# Altium PCB main.PcbDoc
Units mil, origin at the board's own origin, x right, y up, seen from the top; angles counter-clockwise.
Board outline 3149.61 x 1417.32 mil, 2 copper layers (Top Layer, Bottom Layer); 65 components, 52 nets, 246 pads, 43 vias.
Unrouted connection lines stored in the file: 108.
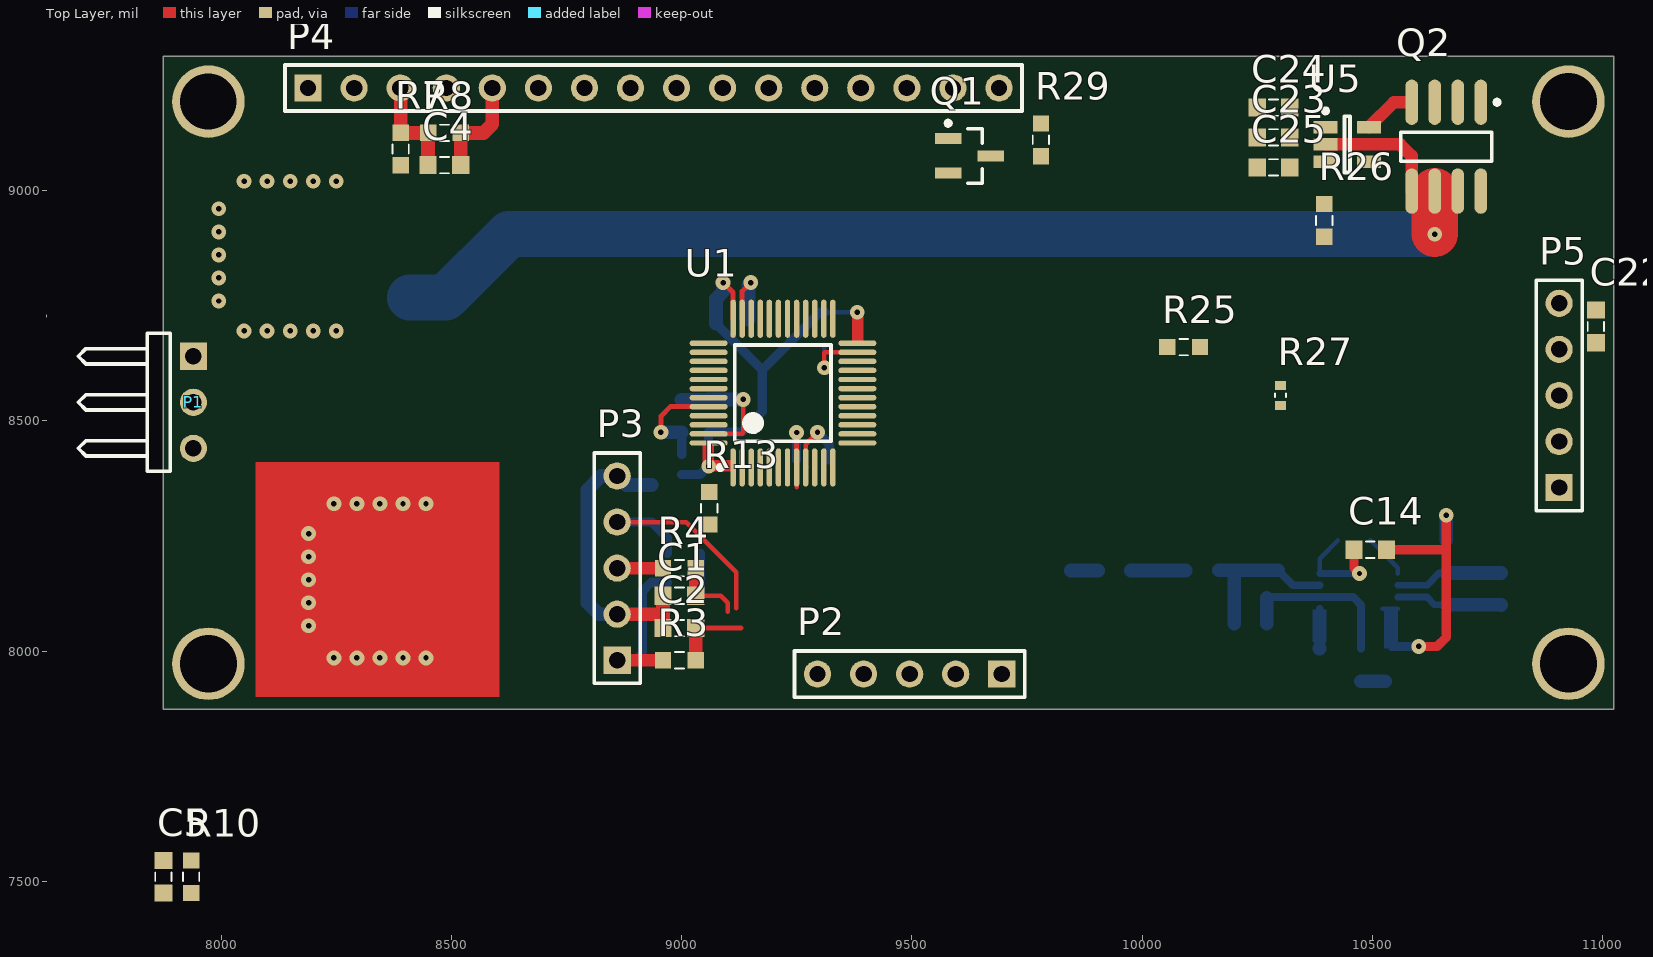
[diagram p0: Top Layer view]
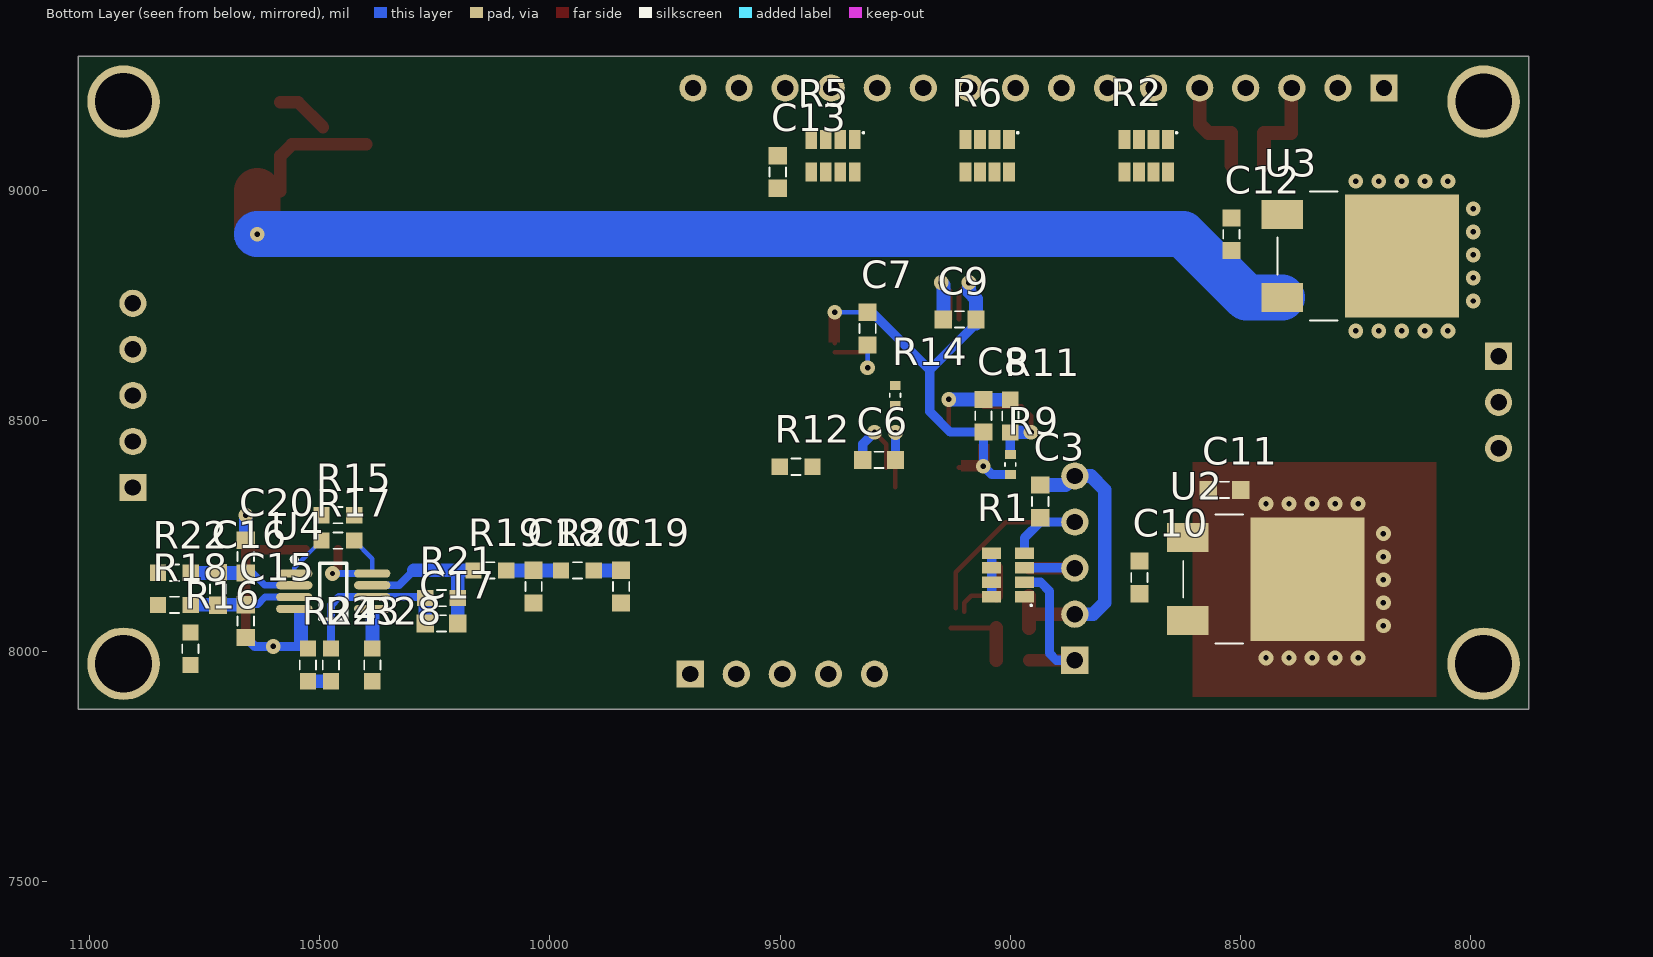
[diagram p1: Bottom Layer view, seen from below]

## Layer stack, top to bottom
Top Solder: solder mask 0.4, Solder Resist, Dk 3.5
Top Layer: signal copper 1.4
Dielectric 1: dielectric 12.6, FR-4, Dk 4.8
Bottom Layer: signal copper 1.4
Bottom Solder: solder mask 0.4, Solder Resist, Dk 3.5

## Board outline
7874.02,7874.02 7874.02,9291.34 11023.62,9291.34 11023.62,7874.02

## Design rules (kind name [scope] priority, off if disabled: settings)
Clearance [All] p1: gap=10 except(5: SMDPad-SMDPad; 8: Track-Track Track-SMDPad)
PolygonConnect [All] p1: connectstyle=Relief reliefconductorwidth=10 reliefentries=4 polygonreliefangle="90 Angle" airgapwidth=10
RoutingVias [All] p1: holewidth=11.81 width=32 viastyle="Through Hole" minholewidth=11.81 minwidth=32 maxholewidth=11.81 maxwidth=100
SolderMaskExpansion [All] p1: expansion=4
Width [All] p1: maxlimit=100 minlimit=6 preferedwidth=10 minimp=50.000000 maximp=50.000000 favimp=50.000000
30 further rules are at their usual default settings.

## Classes and differential pairs
component class "Weller FrontEnd": C14 C15 C16 C17 C18 C19 C20 C22 C23 C24 C25 P5 Q2 R15 R16 R17 R18 R19 R20 R21 R22 R23 R24 R25 R26 R28 U4 U5
component class Power: C10 C11 C12 C13 R14 R27 U2 U3
component class MCU: C5 C6 C7 C8 C9 R9 R10 R11 R12 R13 U1
component class HD44780: C4 P4 Q1 R2 R5 R6 R7 R8 R29
component class Encoder: C1 C2 C3 P3 R1 R3 R4
component class Debugging: P1 P2

## Components (designator, comment, footprint, x,y, rotation, side; value= is the part's Value field where it differs from the comment)
C1 "C" C0603 8995,8120 r180 top
C2 "C" C0603 8995,8050 r180 top
C3 "C" C0603 8935,8325 r90 bottom
C4 "C" C0603 8485,9055 r0 top
C5 "C" C0603 7875,7510 r270 top
C6 "C" C0603 9285,8415 r180 bottom
C7 "C" C0603 9310,8700 r270 bottom
C8 "C" C0603 9058.58,8510.79 r90 bottom
C9 "C" C0603 9110,8720 r0 bottom
C10 "C" C0603 8720,8160 r90 bottom
C11 "C" C0603 8535,8350 r0 bottom
C12 "C" C0603 8520,8905 r90 bottom
C13 "C" C0603 9505,9040 r270 bottom
C14 "100n" C0603 10495,8220 r180 top
C15 "10n" C0603 10660,8065 r90 bottom
C16 "100n" C0603 10720,8135 r90 bottom
C17 "100n" C0603 10235,8060 r0 bottom
C18 "100n" C0603 10035,8140 r270 bottom
C19 "100n" C0603 9845,8140 r270 bottom
C20 "10n" C0603 10660,8205 r270 bottom
C22 "C" C0603 10985,8705 r270 top
C23 "C" C0603 10285,9115 r180 top
C24 "C" C0603 10285,9180 r180 top
C25 "100n" C0603 10285,9050 r180 top
P1 "Header 3" "HEADER1X3H Male" 7940,8640 r270 top
P2 "Header 5" HDR1X5 9695,7950 r180 top
P3 "Header 5" HDR1X5 8860,7980 r90 top
P4 "Header 16" "HEADER 1X16 Female" 8188.98,9222.44 r0 top locked
P5 "Header 5" HDR1X5 10905,8355 r90 top
Q1 "NMOS-GSD" SOT-23_M 9625,9075 r0 top
Q2 "IRF7416" SOIC-8_M 10660,9095 r270 top
R1 "R" "4R pack 1206" 9005,8165 r0 bottom
R2 "R" "4R pack 1206" 8705,9075 r270 bottom
R3 "R" 0603 8995,7980 r180 top
R4 "R" 0603 8995,8180 r180 top
R5 "R" "4R pack 1206" 9385,9075 r270 bottom
R6 "R" "4R pack 1206" 9050,9075 r270 bottom
R7 "R" 0603 8390,9090 r90 top
R8 "R" 0603 8485,9125 r0 top
R9 "R" 0402 9000,8405 r90 bottom
R10 "R" 0603 7935,7510 r90 top
R11 "R" 0603 9000,8510 r90 bottom
R12 "R" 0603 9465,8400 r180 bottom
R13 "R" 0603 9060,8310 r90 top
R14 "R" 0402 9250,8555 r270 bottom
R15 "10R" 0603 10460,8295 r180 bottom
R16 "10M" 0603 10780,8005 r90 bottom
R17 "1M" 0603 10460,8240 r0 bottom
R18 "1k" 0603 10815,8100 r180 bottom
R19 "1k" 0603 10130,8175 r180 bottom
R20 "10k" 0603 9940,8175 r180 bottom
R21 "100k" 0603 10235,8115 r0 bottom
R22 "1k" 0603 10815,8170 r180 bottom
R23 "150R" 0603 10475,7970 r270 bottom
R24 "68R" 0603 10525,7970 r90 bottom
R25 "R" 0603 10090,8660 r0 top
R26 "R" 0603 10395,8935 r90 top
R27 "R" 0402 10300,8555 r270 top
R28 "220R" 0603 10385,7970 r270 bottom
R29 "R" 0603 9780,9110 r270 top
U1 "STM32F030C6T6" QFP_48_0.5_M 9220,8560 r90 top
U2 "LD1117" TO-252 8224.79,8156.17 r270 bottom
U3 "LD1117" TO-252 8019.79,8857.54 r270 bottom
U4 "MCP6N16" MSOP-MS8_M 10470,8130 r180 bottom
U5 "MCP1402" SOT23-5_M 10445,9100 r0 top

## Footprints (in the part's own frame and the unit in brackets; to place one, negate y for a bottom-side part, rotate by r counter-clockwise, add the part's x,y. Pads: shape width x height; smd on the part's side, far side on the other; paste and mask are expansions set on the pad)
"4R pack 1206" [mm] "Chip Array, Flat, 8-Leads, Pitch 0.80mm,  Body 3.20x1.60mm,  IPC Low Density"
  rect 1.05x0.65 smd: 1(-0.9,1.2) 2(-0.9,0.4) 3(-0.9,-0.4) 4(-0.9,-1.2) 5(0.9,-1.2) 6(0.9,-0.4) 7(0.9,0.4) 8(0.9,1.2)
  silkscreen extent -1.32,1.63 -1.23,1.72, body extent -0.8,-1.6 0.8,1.6, height 0.5
0402 [mm] "SMD Resistor, Inch 0402, Metric 1005."
  rect 0.5x0.6 smd: 1(-0.55,0) 2(0.55,0)
  silkscreen extent -0.1,-0.3 0.1,0.3, body extent -0.52,-0.3 0.52,0.3, height 0.34
0603 [mm] "SMD Resistor, Inch 0603, Metric 1608."
  rect 0.9x0.9 smd: 1(-0.9,0) 2(0.9,0)
  silkscreen extent -0.25,-0.45 0.25,0.45, body extent -0.8,-0.45 0.8,0.45, height 0.5
C0603 [mm] "SMD Capacitor, Inch 0603, Metric 1608."
  rect 0.95x1 smd: 1(-0.9,0) 2(0.9,0)
  silkscreen extent -0.25,-0.45 0.25,0.45, body extent -0.8,-0.4 0.8,0.4, height 0.3
HDR1X5 [mm] "Connector; Header; 5 Position"
  rect 1.5x1.5 hole 0.9: 1(0,0)
  round 1.5 hole 0.9: 2(2.54,0) 3(5.08,0) 4(7.62,0) 5(10.16,0)
  silkscreen extent -1.27,-1.27 11.43,1.27
"HEADER1X3H Male" [mm] "Connector; Header; 3 Position; Right Angle; Male"
  rect 1.5x1.5 hole 0.9: 1(0,0)
  round 1.5 hole 0.9: 2(2.54,0) 3(5.08,0)
  silkscreen extent -1.27,-6.35 6.35,-1.27, body extent -1.17,-10.76 6.25,0.38, height 2.75
"HEADER 1X16 Female" [mm] "Connector; Header; 16 Position; Female"
  rect 1.5x1.5 hole 0.9: 1(0,0)
  round 1.5 hole 0.9: 2(2.54,0) 3(5.08,0) 4(7.62,0) 5(10.16,0) 6(12.7,0) 7(15.24,0) 8(17.78,0) 9(20.32,0) 10(22.86,0) 11(25.4,0) 12(27.94,0) 13(30.48,0) 14(33.02,0) 15(35.56,0) 16(38.1,0)
  silkscreen extent -1.27,-1.27 39.37,1.27, body extent -1.39,-1.25 39.5,1.25, height 8.5
MSOP-MS8_M [mm] "TSOP, 8-Leads, Body 3x3mm, Pitch 0.65mm, IPC Low Density"
  oval 2x0.45 smd: 1(-2.15,0.975) 2(-2.15,0.325) 3(-2.15,-0.325) 4(-2.15,-0.975) 5(2.15,-0.975) 6(2.15,-0.325) 7(2.15,0.325) 8(2.15,0.975)
  silkscreen extent -2.27,-1.55 0.75,1.87, body extent -2.45,-1.5 2.45,1.5, height 1.15
QFP_48_0.5_M [mm] "QFP, 48-Leads, Body 7x7mm, Pitch 0.5mm, IPC Low Density"
  oval 2.1x0.3 smd: 1(-4.1,2.75) 2(-4.1,2.25) 3(-4.1,1.75) 4(-4.1,1.25) 5(-4.1,0.75) 6(-4.1,0.25) 7(-4.1,-0.25) 8(-4.1,-0.75) 9(-4.1,-1.25) 10(-4.1,-1.75) 11(-4.1,-2.25) 12(-4.1,-2.75) 25(4.1,-2.75) 26(4.1,-2.25) 27(4.1,-1.75) 28(4.1,-1.25) 29(4.1,-0.75) 30(4.1,-0.25) 31(4.1,0.25) 32(4.1,0.75) 33(4.1,1.25) 34(4.1,1.75) 35(4.1,2.25) 36(4.1,2.75)
  oval 0.3x2.1 smd: 13(-2.75,-4.1) 14(-2.25,-4.1) 15(-1.75,-4.1) 16(-1.25,-4.1) 17(-0.75,-4.1) 18(-0.25,-4.1) 19(0.25,-4.1) 20(0.75,-4.1) 21(1.25,-4.1) 22(1.75,-4.1) 23(2.25,-4.1) 24(2.75,-4.1) 37(2.75,4.1) 38(2.25,4.1) 39(1.75,4.1) 40(1.25,4.1) 41(0.75,4.1) 42(0.25,4.1) 43(-0.25,4.1) 44(-0.75,4.1) 45(-1.25,4.1) 46(-1.75,4.1) 47(-2.25,4.1) 48(-2.75,4.1)
  silkscreen extent -4.22,-2.65 2.65,3.57, body extent -4.5,-4.5 4.5,4.5, height 1.46
SOIC-8_M [mm] "SOIC, 8-Leads, Body 4.9x3.9mm, Pitch 1.27mm, IPC Low Density"
  oval 2.5x0.7 smd: 1(-2.45,1.905) 2(-2.45,0.635) 3(-2.45,-0.635) 4(-2.45,-1.905) 5(2.45,-1.905) 6(2.45,-0.635) 7(2.45,0.635) 8(2.45,1.905)
  silkscreen extent -2.57,-2.5 0.8,2.93, body extent -3,-2.45 3,2.45, height 1.7
SOT23-5_M [mm] "SOT23, 5-Leads, Body 2.9x1.6mm, Pitch 0.95mm, Lead Span 2.8mm, IPC Low Density"
  rect 1.3x0.7 smd: 1(-1.2,0.95) 2(-1.2,0) 3(-1.2,-0.95) 4(1.2,-0.95) 5(1.2,0.95)
  silkscreen extent -1.32,-1.55 0.15,1.97, body extent -1.25,-1.5 1.25,1.5, height 1.06
SOT-23_M [mm] "SOT23, 3-Leads, Body 2.9x1.3mm, Pitch 0.95mm, Lead Span 2.5mm, IPC Low Density"
  rect 1.45x0.6 smd: 1(-1.175,0.95) 2(-1.175,-0.95) 3(1.175,0)
  silkscreen extent -1.3,-1.5 0.7,1.92, body extent -0.7,-1.5 0.7,1.5, height 1.1
TO-252 [mm] "JEDEC standard. TO-252, variant AA."
  rect 1.6x2.3 smd: 1(-2.286,-9.906) 3(2.286,-9.906)
  rect 6.8x6.3 smd: 4(0,-3.302)
  silkscreen extent -3.56,-10.16 3.56,-6.86, body extent -3.37,-10.67 3.37,-0.57, height 2.37

## Part data
C1 C2 C3 C4 C5 C6 C7 C8 C9 C10 C11 C12 C13 C14 C15 C16 C17 C18 C19 C20 C22 C23 C24 C25: library part Cap, "Generic capacitor"
P1: "Header, 3-Pin"
P2 P3 P5: "Header, 5-Pin"
P4: "Header, 16-Pin"
Q2: "Power P-MOSFET"
R1 R2 R5 R6: library part Rres_pack_4, "4 resistor pack array"
R3 R4 R7 R8 R9 R10 R11 R12 R13 R14 R15 R16 R17 R18 R19 R20 R21 R22 R23 R24 R25 R26 R27 R28 R29: library part Res, "Generic resistor"
U1: "ARM Cortex-M0 32-bit MCU, 32 KB Flash, 4 KB Internal RAM, 39 I/Os, 48-pin LQFP, -40 to 85 degC, Tray"
U2 U3: "Low drop positive voltage regulator"
U5: "MCP1402 MOSFET driver"

## Free pads (board coordinates)
  round 157.48 hole 122.05: 0(7972.44,9192.91)
  round 157.48 hole 124.02: 1(7972.44,7972.44) 2(10925.2,7972.44) 3(10925.2,9192.91)

## Via types
v1: diameter 32, hole 11.81, Top Layer to Bottom Layer, 43 vias

## Nets (pads, with @x,y where several pads share a name; then routed paths per layer and width w, separated by ;. In a path a pad name is that pad's centre, name@x,y a point inside that pad or via, vN(x,y) a via of type N, cw(c..) or ccw(c..) an arc to the next point about the centre after c; other vN are vias at no path point)
3V3_AN: R15.1 R16.1 R27.2
3V3_DIG: C11.1 P2.1 R1.5 R1.6 R1.7 R1.8 R10.1 R12.1 R13.1 R27.1 U2.4 | length 94.5
  Bottom Layer w20: R1.8 R1.7 R1.6 R1.5
3V3_STM: C7.1 C8.1 C9.1 R9.1 R13.2 U1.1 U1.24 U1.36 U1.48 | length 1108.9
  Top Layer w10: v1(9058.58,8401.42) 9061.42,8398.58 U1.1 ; U1.24 v1(9381.42,8735.43)
  Top Layer w11: v1(9090,8800) 9111.73,8778.27 U1.36
  Top Layer w20: v1(9058.58,8401.42) 9058.58,8440
  Bottom Layer w10: C7.1 v1(9381.42,8735.43)
  Bottom Layer w20: R9.1 9040.51,8383.35 v1(9058.58,8401.42) C8.1 9130.35,8475.35 9175,8520 9175,8610 ; C9.1@9074.57,8710.43 9175,8610 ; C7.1 9300.43,8735.43 9175,8610
  Bottom Layer w30: C9.1@9074.57,8710.43 C9.1 9074.57,8764.57 9090,8780 v1(9090,8800)
12V: C10.1 C12.1 C23.1 C24.1 C25.1 Q2.5 Q2.6 Q2.7 Q2.8 U2.3 U3.3 U5.2 | length 2649.7
  Top Layer w27: U5.2 10560,9100 10585,9075 Q2.5
  Top Layer w100: v1(10635,8905) Q2.6
  Bottom Layer w100: U3.3 8487.54,8767.54 8625,8905 v1(10635,8905)
AGND: C6.2 C14.1 C15.1 C18.2 C19.2 C20.1 R14.2 R24.2 R28.2 U1.8 U4.4 | length 859.5
  Top Layer w10: U1.8 9250.31,8397.8 9250.31,8355.32
  Top Layer w11: U1.8 v1(9249.53,8474.53)
  Top Layer w20: C14.1 10660,8220 ; v1(10600,8010) 10640,8010 10660,8030 10660,8220 ; v1(10660,8295) 10660,8220
  Bottom Layer w10: U4.4@10521.61,8091.61 U4.4 ; R24.2@10540,8005.43 10544.57,8010
  Bottom Layer w11: C6.2 C6.2@9249.53,8415.04
  Bottom Layer w20: C6.2@9249.53,8415.04 v1(9249.53,8474.53) ; 10544.57,8010 v1(10600,8010) 10640.43,8010 C15.1
  Bottom Layer w30: C20.1 v1(10660,8295)
BACK: Q1.1 R5.4 U1.17
BTN: C3.1 P3.4 R1.4 U1.2 | length 539.6
  Top Layer w10: P3.4 9010,8280 9118.75,8171.25 9118.75,8092.5
  Bottom Layer w20: P3.4 8935,8280 8969.57,8245.43 R1.4
CONTR: R7.1 U1.32
D0: P4.7 R2.3 U1.27
D1: P4.8 R6.1 U1.26
D2: P4.9 R6.2 U1.25
D3: P4.10 R6.3 U1.22
D4: P4.11 R6.4 U1.21
D5: P4.12 R5.1 U1.20
D6: P4.13 R5.2 U1.19
D7: P4.14 R5.3 U1.18
DETECTOR: P5.4 R25.2
EN: P4.6 R2.2 U1.28
GND: C1.2 C2.2 C3.2 C4.2 C5.2 C7.2 C8.2 C9.2 C10.2 C11.2 C12.2 C13.2 C22.2 C23.2 C24.2 C25.2 P1.3 P2.3 P3.2 P3.5 P4.1 P4.5 P5.3 Q1.2 R8.2 R11.2 R14.1 U1.23 U1.35 U1.47 U2.1 U3.1 U5.1 U5.4 | length 1485.8
  Top Layer w10: U1.47 9131.42,8471.42 9133.78,8473.78 v1(9133.78,8546.22) ; v1(9310,8615) 9310,8648.58 U1.23
  Top Layer w11: U1.35 9131.42,8781.42 v1(9150,8800)
  Top Layer w30: C4.2 R8.2 8570,9125 8588.98,9143.98 P4.5 ; P3.2 8959.57,8080 ; C2.2 8959.57,8080 ; C1.2 8959.57,8080
  Bottom Layer w10: C7.2 v1(9310,8615) v1@9315,8615
  Bottom Layer w30: P3.2 8820,8080 8795,8105 8795,8350 8825,8380 P3.5 8879.57,8360.43 C3.2 ; R11.2 9057.8,8545.43 C8.2 v1(9133.78,8546.22) ; C9.2 9145.43,8795.43 v1(9150,8800)
HEAT: C22.1 P5.5 Q2.1 Q2.2 Q2.3
LED+: C13.1 P4.2 P4.15 R2.5 R2.6 R2.7 R2.8 R5.5 R5.6 R5.7 R5.8 R6.5 R6.6 R6.7 R6.8 U3.4
LED-: P4.16 R29.1
N: P3.3 R1.3 R4.2 | length 209.4
  Top Layer w27: P3.3 R4.2
  Bottom Layer w20: P3.3 8860.75,8180.75 R1.3
NetC1_1: C1.1 R4.1 U1.3 | length 155.8
  Top Layer w10: C1.1 9085,8120 9100,8105 9100,8085
  Top Layer w30: C1.1 R4.1
NetC2_1: C2.1 R3.1 U1.4 | length 169.1
  Top Layer w10: C2.1 9129.54,8050
  Top Layer w30: R3.1 C2.1
NetC6_1: C6.1 R12.2 U1.9 | length 158.7
  Top Layer w10: U1.9@9269.99,8399.36 U1.9 9269.21,8449.21 v1(9295,8475)
  Bottom Layer w20: v1(9295,8475) 9320.43,8449.57 C6.1
NetC14_2: C14.2 R15.2 R17.1 U4.8 | length 230.7
  Top Layer w20: C14.2 10459.57,8180.43 v1(10471.61,8168.39)
  Bottom Layer w10: U4.8 10385.35,8200.79 R17.1
  Bottom Layer w15: U4.8 v1(10471.61,8168.39)
NetC15_2: C15.2 C16.1 R16.2 R18.2 U4.3 | length 232
  Bottom Layer w15: U4.3 10617.8,8117.2 10634.57,8100.43 C15.2
  Bottom Layer w30: C15.2 10779.13,8100.43 R18.2
NetC16_2: C16.2 C20.2 R22.2 U4.2 | length 236.2
  Bottom Layer w15: U4.2 10617.8,8142.8 10644.57,8169.57 C20.2
  Bottom Layer w30: C20.2 10779.13,8169.57 R22.2
NetC17_1: C17.1 R19.1 R21.1 U4.7 | length 348.6
  Bottom Layer w17: 10294.57,8175.43 10327.2,8142.8 U4.7
  Bottom Layer w30: R19.1@10165.87,8175.43 10200,8175.43 ; C17.1 R21.1 10199.57,8175 10200,8175.43 ; 10294.57,8175.43 10200,8175.43
NetC17_2: C17.2 R21.2 R23.1 U4.6 | length 362.6
  Bottom Layer w17: R21.2@10270,8115 R21.2 10272.64,8117.2 U4.6 10457.8,8117.2 10475,8100 R23.1
  Bottom Layer w30: C17.2 R21.2
NetC18_1: C18.1 R19.2 R20.1 | length 119.1
  Bottom Layer w30: R20.1 R19.2
NetC19_1: C19.1 R20.2 U1.10 | length 59.7
  Bottom Layer w30: C19.1 9845.43,8175 R20.2
NetP1_1: P1.1 U1.30
NetP1_2: P1.2 U1.31
NetP2_2: P2.2 U1.37
NetP2_4: P2.4 U1.34
NetQ1_3: Q1.3 R29.2
NetQ2_4: Q2.4 U5.5 | length 115.1
  Top Layer w27: U5.5 10546.3,9191.46 Q2.4
NetR9_2: R9.2 R11.1 U1.44 | length 240.2
  Top Layer w11: v1(8955,8475) 8955,8510 8975.47,8530.47 U1.44
  Bottom Layer w20: R9.2 R11.1
  Bottom Layer w30: v1(8955,8475) 8999.57,8475 R11.1
NetR17_2: R17.2 U4.1 | length 96.1
  Bottom Layer w10: R17.2 10554.65,8180.79 U4.1
NetR23_2: R23.2 R24.1 | length 52.7
  Bottom Layer w30: R23.2 R24.1 R24.1@10527.7,7934.57
NetR25_1: R25.1 U1.11
NetR26_1: R26.1 U1.29
NetR26_2: R26.2 U5.3
NetR28_1: R28.1 U4.5 | length 86.3
  Bottom Layer w17: 10385.35,8075.35 U4.5
  Bottom Layer w25: R28.1@10385.35,8005.79 10385.35,8075.35
  Bottom Layer w30: R28.1 R28.1@10385.35,8005.79
NRST: C5.1 P2.5 R10.2 U1.7
P: P3.1 R1.2 R3.2 | length 358.3
  Top Layer w27: P3.1 R3.2
  Bottom Layer w20: P3.1 8900,7980 8915,7995 8915,8130 8934.25,8149.25 R1.2
RS: P4.4 R2.1 U1.39
SENS+: P5.1 R18.1
SENS-: P5.2 R22.1
V0: C4.1 P4.3 R7.2 R8.1 | length 227.2
  Top Layer w30: P4.3 8390,9221.42 R7.2 8390.43,9125 R8.1 C4.1
pads on no net: R1.1 R2.4 U1.5 U1.6 U1.12 U1.13 U1.14 U1.15 U1.16 U1.33 U1.38 U1.40 U1.41 U1.42 U1.43 U1.45 U1.46
copper on no net:
  other v1: 8245,7985 8295,7985 8345,7985 8395,7985 8445,7985 8190,8055 8190,8105 8190,8155 8190,8205 8190,8255 8245,8320 8295,8320 8345,8320 8395,8320 8445,8320 8050,8695 8100,8695 8150,8695 8200,8695 8250,8695 7995,8760 7995,8810 7995,8860 7995,8910 7995,8960 8050,9020 8100,9020 8150,9020 8200,9020 8250,9020

## Other copper
Top Layer:
  region net 3V3_STM: 9395,8735.43 9370,8735.43 9370,8670 9395,8670
  region net 3V3_STM: 9058.58,8415 9058.58,8390 9107.17,8390 9107.17,8415
  rectangle net 3V3_STM: 9045,8401.42 9070,8450
  rectangle: 8075,7900 8605,8410
Bottom Layer:
  rectangle net NetR28_1: 10370,8020 10400,8090
  rectangle net AGND: 10525,8005 10555,8091.61

## Dimensions
7874.02,9291.34 to 8188.98,9222.44 on Mechanical 1
10925.2,7972.44 to 11023.62,7874.02 on Mechanical 1
7972.44,7972.44 to 7874.02,7874.02 on Mechanical 1
7972.44,9192.91 to 7874.02,9291.34 on Mechanical 1
7874.02,9291.34 to 7972.44,9192.91 on Mechanical 1
7874.02,9291.34 to 7866.14,7874.02 on Mechanical 1
7874.02,9291.34 to 11023.62,9291.34 on Mechanical 1